# Altium PCB CAMtastic1_2.PcbDoc
Units mm, origin at the board's own origin, x right, y up, seen from the top; angles counter-clockwise.
Board outline 152.47 x 75 mm, 2 copper layers (Top Layer, Bottom Layer); 78 components, 55 nets, 266 pads, 0 vias.
Unrouted connection lines stored in the file: 89.
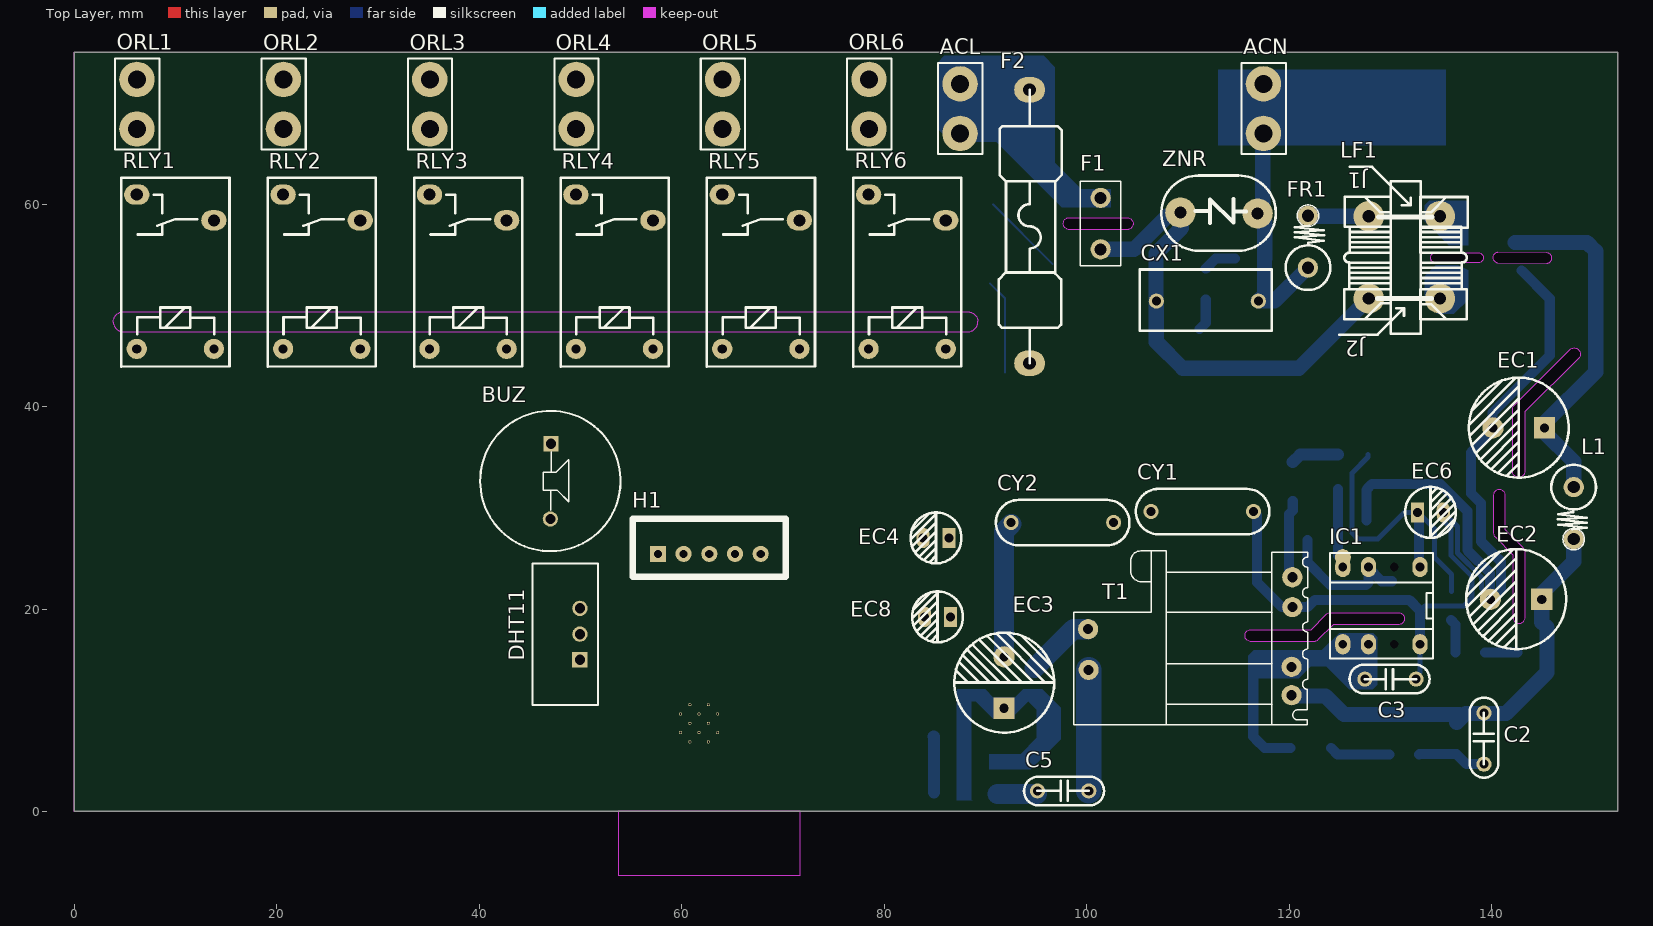
[diagram p0: Top Layer view]
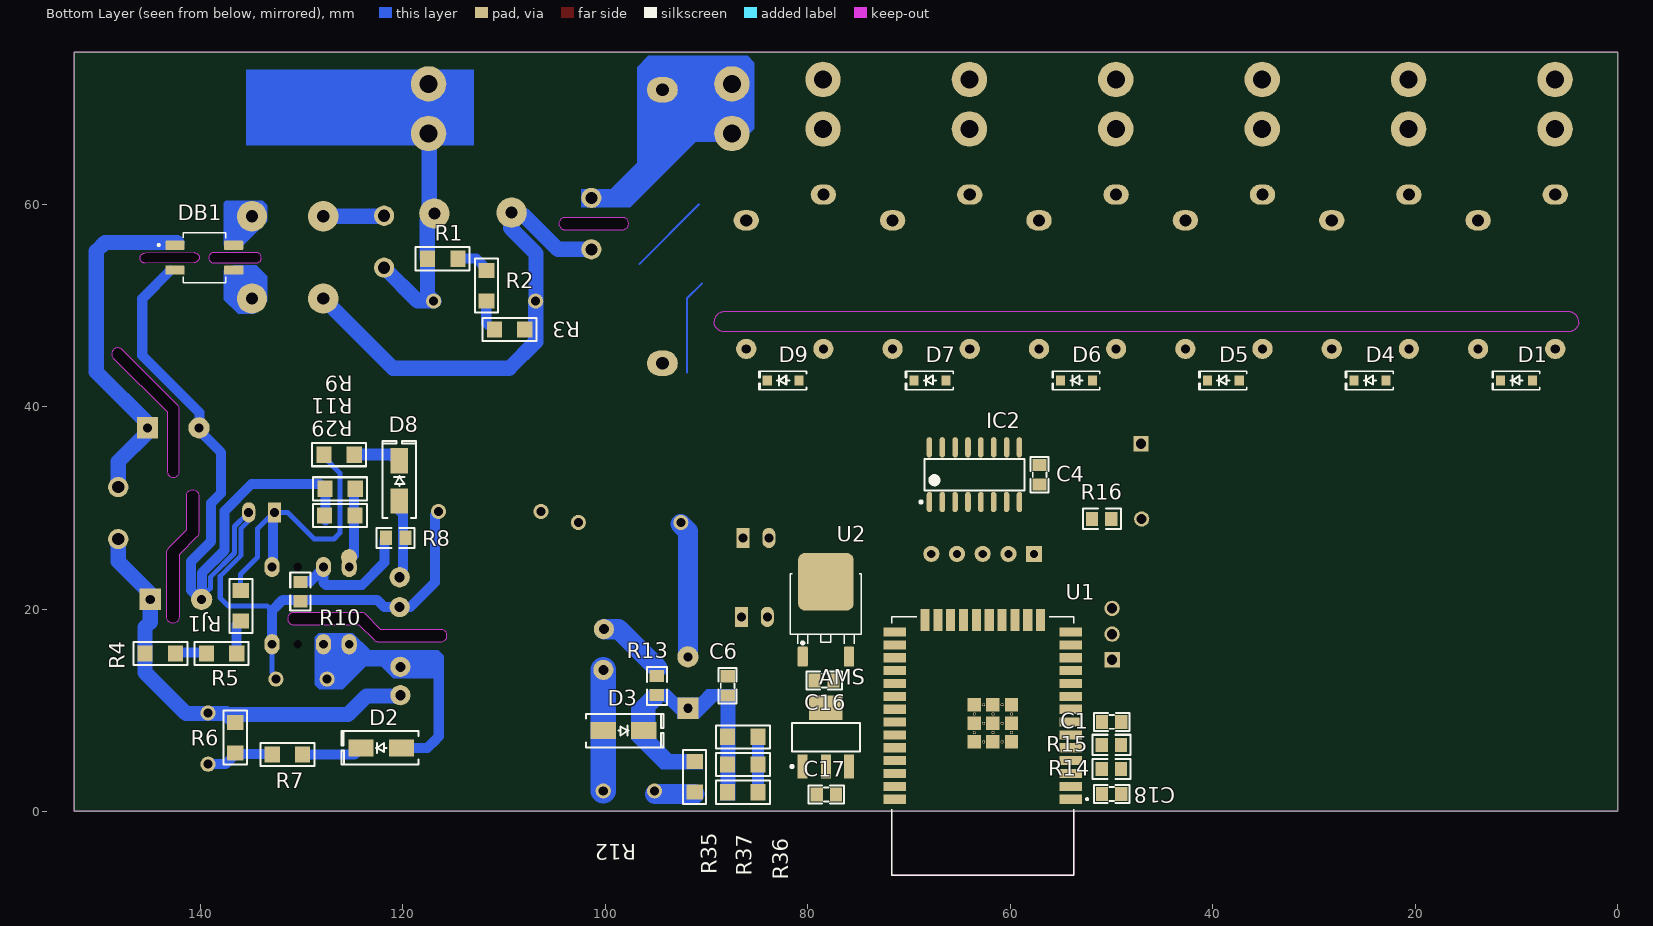
[diagram p1: Bottom Layer view, seen from below]

## Layer stack, top to bottom
Top Solder: solder mask 0.0102, Solder Resist, Dk 3.5
Top Layer: signal copper 0.0356
Dielectric 1: dielectric 0.32, FR-4, Dk 4.8
Bottom Layer: signal copper 0.0356
Bottom Solder: solder mask 0.0102, Solder Resist, Dk 3.5

## Board outline
0,0 152.47,0 152.47,75 0,75
cut-out: 140.62,54.225 145.47,54.175 ccw(c145.475,54.675) 145.975,54.675 ccw(c145.475,54.675) 145.48,55.175 140.63,55.225 ccw(c140.625,54.725)
cut-out: 134.49,54.2 cw(c134.49,54.7) 134.49,55.2 138.69,55.2 cw(c138.69,54.7) 139.19,54.7 cw(c138.69,54.7) 138.69,54.2
cut-out: 116.25,16.775 cw(c116.25,17.375) 116.25,17.975 122.176,17.975 123.675,19.475 cw(c124.1,19.05) 124.1,19.65 130.8,19.65 cw(c130.8,19.05) 131.4,19.05 cw(c130.8,19.05) 130.8,18.45 124.349,18.45 122.85,16.95 cw(c122.425,17.375) 122.425,16.775
cut-out: 140.35,27.139 142.125,25.365 142.125,19.175 ccw(c142.725,19.175) 143.325,19.175 143.325,25.613 ccw(c142.725,25.613) 143.15,26.038 141.375,27.812 141.375,31.2 ccw(c140.775,31.2) 140.175,31.2 140.175,27.563 ccw(c140.775,27.563)
cut-out: 142.089,33.609 142.089,39.715 cw(c142.69,39.715) 142.265,40.139 147.75,45.625 cw(c148.175,45.2) 148.775,45.2 cw(c148.175,45.2) 148.6,44.775 143.29,39.466 143.29,33.609 cw(c142.69,33.609)
cut-out: 98.306,57.476 cw(c98.306,58.076) 98.306,58.677 104.001,58.677 cw(c104.001,58.076) 104.601,58.076 cw(c104.001,58.076) 104.001,57.476

## Design rules (kind name [scope] priority, off if disabled: settings)
Clearance AC_DC [InNetClass('HighVol') vs InNetClass('DCVol')] p1: gap=6 ignorepadtopadclearanceinfootprint=FALSE
Clearance "Low Power/Signal" [All] p2: gap=0.254 ignorepadtopadclearanceinfootprint=FALSE
Clearance "220VAC / 310VDC" [InNetClass('HighVol') vs InNetClass('HighVol')] p3: gap=2.5 ignorepadtopadclearanceinfootprint=FALSE
PolygonConnect CAM_PolygonConnect_$Net1 [InNet('$Net1')] p1: connectstyle=Direct reliefconductorwidth=0.254 reliefentries=4 polygonreliefangle="90 Angle" airgapwidth=0.254
PolygonConnect CAM_PolygonConnect_$Net12 [InNet('$Net12')] p2: connectstyle=Direct reliefconductorwidth=0.254 reliefentries=4 polygonreliefangle="90 Angle" airgapwidth=0.254
PolygonConnect CAM_PolygonConnect_$Net5 [InNet('$Net5')] p3: connectstyle=Direct reliefconductorwidth=0.254 reliefentries=4 polygonreliefangle="90 Angle" airgapwidth=0.254
PolygonConnect CAM_PolygonConnect_$Net15 [InNet('$Net15')] p4: connectstyle=Direct reliefconductorwidth=0.254 reliefentries=4 polygonreliefangle="90 Angle" airgapwidth=0.254
PolygonConnect CAM_PolygonConnect_$Net11 [InNet('$Net11')] p5: connectstyle=Direct reliefconductorwidth=0.254 reliefentries=4 polygonreliefangle="90 Angle" airgapwidth=0.254
PolygonConnect CAM_PolygonConnect_$Net33 [InNet('$Net33')] p6: connectstyle=Direct reliefconductorwidth=0.254 reliefentries=4 polygonreliefangle="90 Angle" airgapwidth=0.254
PolygonConnect CAM_PolygonConnect_$Net27 [InNet('$Net27')] p7: connectstyle=Direct reliefconductorwidth=0.254 reliefentries=4 polygonreliefangle="90 Angle" airgapwidth=0.254
PolygonConnect CAM_PolygonConnect_$Net13 [InNet('$Net13')] p8: connectstyle=Direct reliefconductorwidth=0.254 reliefentries=4 polygonreliefangle="90 Angle" airgapwidth=0.254
PolygonConnect CAM_PolygonConnect_$Net17 [InNet('$Net17')] p9: connectstyle=Direct reliefconductorwidth=0.254 reliefentries=4 polygonreliefangle="90 Angle" airgapwidth=0.254
PolygonConnect CAM_PolygonConnect_$Net23 [InNet('$Net23')] p10: connectstyle=Direct reliefconductorwidth=0.254 reliefentries=4 polygonreliefangle="90 Angle" airgapwidth=0.254
PolygonConnect CAM_PolygonConnect_$Net38 [InNet('$Net38')] p11: connectstyle=Direct reliefconductorwidth=0.254 reliefentries=4 polygonreliefangle="90 Angle" airgapwidth=0.254
PolygonConnect CAM_PolygonConnect_$Net8 [InNet('$Net8')] p12: connectstyle=Direct reliefconductorwidth=0.254 reliefentries=4 polygonreliefangle="90 Angle" airgapwidth=0.254
PolygonConnect CAM_PolygonConnect_$Net3 [InNet('$Net3')] p13: connectstyle=Direct reliefconductorwidth=0.254 reliefentries=4 polygonreliefangle="90 Angle" airgapwidth=0.254
PolygonConnect CAM_PolygonConnect_$Net2 [InNet('$Net2')] p14: connectstyle=Direct reliefconductorwidth=0.254 reliefentries=4 polygonreliefangle="90 Angle" airgapwidth=0.254
PolygonConnect [All] p15: connectstyle=Relief reliefconductorwidth=0.254 reliefentries=4 polygonreliefangle="90 Angle" airgapwidth=0.254
RoutingVias [All] p1: holewidth=0.711 width=1.27 viastyle="Through Hole" minholewidth=0.711 minwidth=1.27 maxholewidth=0.711 maxwidth=1.27
SolderMaskExpansion [All] p1: expansion=0.102 istentingtop=FALSE
Width "+12V, GND" [All] p1: maxlimit=5 minlimit=0.5 preferedwidth=2.5
Width "AC, 310VDC" [InNetClass('HighVol')] p2: maxlimit=2.5 minlimit=0.6 preferedwidth=1.5
Width "Signal - VDD, FB, CS" [InNetClass('All Nets')] p3: maxlimit=1 minlimit=0.23 preferedwidth=0.3
Width [All] p4: maxlimit=0.254 minlimit=0.254 preferedwidth=0.254
30 further rules are at their usual default settings.

## Classes and differential pairs
net class DCVol: +3V3 +5 +12 GND
net class HighVol: COM NetACN_1 NetC3_1 NetCX1_1 NetDB1_3 NetDB1_4 NetFR1_2

## Components (designator, comment, footprint, x,y, rotation, side; value= is the part's Value field where it differs from the comment)
ACL "1217861-1" CON1_P192_70D137_TH_ST 87.503,71.882 r0 top
ACN "1217861-1" CON1_P192_70D137_TH_ST 117.475,71.882 r0 top
AMS "AMS1117-3.3V" SOT223 78.225,7.35 r180 bottom value="AMS1117-3.3V SOT223"
BUZ "Coi Chip Speaker" "Coi 14mm" 60.775,37.725 r270 top
C1 "10pF" "tu 0805" 49.993,8.854 r180 bottom
C2 "22/1KV" "TU GOM CAO AP" 142.372,7.306 r270 top
C3 "22/1KV" "TU GOM CAO AP" 129.922,16.193 r0 top
C4 "10pF" "tu 0805" 57.1,33.275 r270 bottom
C5 "22/1KV" "TU GOM CAO AP" 97.782,-1.084 r180 top
C6 "10pF" "tu 0805" 87.928,12.413 r90 bottom
C16 "10pF" "tu 0805" 78.4,12.925 r0 bottom
C17 "10pF" "tu 0805" 78.175,1.675 r0 bottom
C18 "10pF" "tu 0805" 49.993,1.729 r0 bottom
CX1 "0.1" "Tu vuong 10mm" 106.892,46.609 r0 top
CY1 "222M" "TU GOM CAO AP 222M" 111.499,37.014 r0 top
CY2 "222M" "TU GOM CAO AP 222M" 97.675,35.925 r0 top
D1 "T4" "DIODE SOD-123" 9.987,42.575 r0 bottom
D2 "M7" "DIODE SMA" 122.153,6.287 r0 bottom
D3 "SSS510" "DIODE SMA" 98.213,7.996 r180 bottom
D4 "T4" "DIODE SOD-123" 24.477,42.575 r0 bottom
D5 "T4" "DIODE SOD-123" 38.967,42.575 r0 bottom
D6 "T4" "DIODE SOD-123" 53.457,42.575 r0 bottom
D7 "T4" "DIODE SOD-123" 67.947,42.575 r0 bottom
D8 "M7" "DIODE SMA" 120.363,32.664 r90 bottom
D9 "T4" "DIODE SOD-123" 82.437,42.575 r0 bottom
DB1 "MLB10S" MBLS-1 139.827,54.483 r180 bottom
DHT11 "1x3 2.54" DHT11 49.95,17.525 r90 top
EC1 "680uF/25V" "tu hoa 10mm" 142.69,37.9 r180 top
EC2 "680uF/25V" "tu hoa 10mm" 142.43,20.955 r180 top
EC3 "10UF/400V" "tu hoa 10mm" 91.85,12.74 r90 top
EC4 "100uF/16V" "tu hoa 5mm" 85.125,27.025 r180 top
EC6 "47uF/50V" "tu hoa 5mm" 133.974,29.55 r0 top
EC8 "100uF/16V" "tu hoa 5mm" 85.275,19.225 r180 top
F1 "3.15A 250VAC" "Cau chi 2A 250V T2A250V" 99.106,62.519 r270 top
F2 "16A/250VAC" "Cau Chi 250V" 104.07,58.825 r270 top
FR1 "100uH 3A" "CUON CAM - duplicate" 113.101,55.681 r0 top
H1 "Header 5P 2.54 DT" XH2.54M-5 57.65,25.45 r0 top
IC1 "KP212DP" DIP8 129.125,20.335 r180 top
IC2 "ULN2003" "SOP 16" 63.55,33.275 r90 bottom
L1 "100uH 3A" "CUON CAM - duplicate" 156.894,30.088 r180 top
LF1 "47uH SMD" "Cuon Cam AC-AC" 131.432,54.735 r180 top
ORL1 "1217861-1" CON1_P192_70D137_TH_ST 6.191,72.324 r0 top
ORL2 "1217861-1" CON1_P192_70D137_TH_ST 20.654,72.324 r0 top
ORL3 "1217861-1" CON1_P192_70D137_TH_ST 35.118,72.324 r0 top
ORL4 "1217861-1" CON1_P192_70D137_TH_ST 49.581,72.324 r0 top
ORL5 "1217861-1" CON1_P192_70D137_TH_ST 64.045,72.324 r0 top
ORL6 "1217861-1" CON1_P192_70D137_TH_ST 78.508,72.324 r0 top
R1 "0.68R" "tro smd 1206" 116.078,54.6 r180 bottom
R2 "0.68R" "tro smd 1206" 111.76,51.943 r270 bottom
R3 "0.68R" "tro smd 1206" 109.474,47.625 r180 bottom
R4 "0.68R" "tro smd 1206" 143.97,15.621 r0 bottom
R5 "0.68R" "tro smd 1206" 137.922,15.621 r0 bottom
R6 "0.68R" "tro smd 1206" 136.573,7.294 r90 bottom
R7 "0.68R" "tro smd 1206" 131.418,5.621 r0 bottom
R8 "0.22R" "tro smd 0805" 120.712,26.99 r0 bottom
R9 "0.68R" "tro smd 1206" 126.312,35.25 r180 bottom
R10 "0.22R" "tro smd 0805" 130.175,21.717 r90 bottom
R11 "0.68R" "tro smd 1206" 126.214,31.877 r180 bottom
R12 "0.68R" "tro smd 1206" 91.186,3.429 r270 bottom
R13 "0.22R" "tro smd 0805" 94.869,12.446 r270 bottom
R14 "0.22R" "tro smd 0805" 50.023,4.246 r180 bottom
R15 "0.22R" "tro smd 0805" 50.023,6.621 r180 bottom
R16 "0.22R" "tro smd 0805" 50.979,28.961 r180 bottom
R29 "0.68R" "tro smd 1206" 126.238,29.243 r180 bottom
R35 "0.68R" "tro smd 1206" 86.432,1.9 r0 bottom
R36 "0.68R" "tro smd 1206" 86.432,4.638 r0 bottom
R37 "0.68R" "tro smd 1206" 86.432,7.375 r0 bottom
RJ1 "0.68R" "tro smd 1206" 136.017,20.32 r270 bottom
RLY1 "Relay JZC-8F-1H" "Relay 4 chan JZC-8F" 15.33,43.97 r90 top
RLY2 "Relay JZC-8F-1H" "Relay 4 chan JZC-8F" 29.79,43.97 r90 top
RLY3 "Relay JZC-8F-1H" "Relay 4 chan JZC-8F" 44.25,43.97 r90 top
RLY4 "Relay JZC-8F-1H" "Relay 4 chan JZC-8F" 58.71,43.97 r90 top
RLY5 "Relay JZC-8F-1H" "Relay 4 chan JZC-8F" 73.17,43.97 r90 top
RLY6 "Relay JZC-8F-1H" "Relay 4 chan JZC-8F" 87.63,43.97 r90 top
T1 "Bien ap" "BIEN AP EE1610-12V1.1A" 113.028,16.689 r180 top
U1 "NodeMCU LuaNode32" ESP32-WROOM-32D 62.72,6.475 r0 bottom
U2 "78M05 SMD TO252" TO252 78.225,19 r180 bottom
ZNR "MOV-07D471KTR" "Tu MOV - duplicate" 118.716,62.829 r180 top value=126pF

## Footprints (in the part's own frame and the unit in brackets; to place one, negate y for a bottom-side part, rotate by r counter-clockwise, add the part's x,y. Pads: shape width x height; smd on the part's side, far side on the other; paste and mask are expansions set on the pad)
"BIEN AP EE1610-12V1.1A" [mm]
  round 2 hole 1: 1(-7.225,5.2) 2(-7.225,2.4) 3(-7.3,-3.5) 4(-7.3,-6.45) 5(12.825,2.7) 6(12.875,-1.325)
  silkscreen extent -8.81,-9.05 14.3,8.11
"Cau chi 2A 250V T2A250V" [mm]
  round 2 hole 1.2: 1(1.905,2.286) 2(6.985,2.286)
  silkscreen extent 0.27,0.29 8.62,4.29, body extent 0.27,0.32 8.62,4.32, height 8.1
"Cau Chi 250V" [mm] "De Fuse"
  oval 2.54x3.048 hole 1.27: 1(-12.475,-9.7) 2(14.55,-9.7)
  silkscreen extent -12.47,-12.73 14.55,-6.51, body extent -8.64,-12.2 11.06,-7.1, height 9.41
"Coi 14mm" [mm]
  rect 1.5x1.5 hole 1: 1(1.4,-13.675)
  round 1.5 hole 1: 2(8.825,-13.75)
  silkscreen extent -1.86,-20.68 12.01,-6.81
CON1_P192_70D137_TH_ST [mm] "SOLDER TABS"
  round 3.5 hole 1.778: 1(0,-4.9) 1(0,0)
  silkscreen extent -2.16,-6.95 2.21,2.05, body extent -1.62,-6.31 1.47,1.61, height 10.48
"CUON CAM - duplicate" [mm] "Dang cam giong tro"
  round 2 hole 1.2: 1(8.765,-1.961) 2(8.763,3.175)
  silkscreen extent 6.57,-4.16 10.98,4.24, body extent 6.87,-3.51 10.67,1.23, height 13.57
"Cuon Cam AC-AC" [mm] "Cuon Cam 4.5x5"
  round 3 hole 1.2: 1(3.556,4.064) 2(-3.48,4.064) 3(3.556,-4.064) 4(-3.48,-4.064)
  silkscreen extent -6.22,-8.96 6.48,7.62, body extent -5.39,-7.75 5.61,7.75, height 16.77
DHT11 [mm] "DHT11"
  rect 1.52x1.52 hole 1.02: 1(-2.54,0)
  round 1.52 hole 1.02: 2(0,0) 3(2.54,0)
  silkscreen extent -6.98,-1.78 6.98,4.7, body extent -7.01,-1.8 6.98,4.7, height 29.5
"DIODE SMA" [mm] "SMA"
  rect 2.5x1.7 smd: 1(-2,0) 2(2,0)
  silkscreen extent -3.68,-1.65 3.94,1.65, body extent -2.6,-1.37 2.6,1.37, height 2.4
"DIODE SOD-123" [mm] "SOD-123"
  rect 0.9x0.95 smd: 1(-1.575,0) 2(1.575,0)
  silkscreen extent -2.3,-0.92 2.41,0.92, body extent -1.86,-0.78 1.86,0.77, height 1.35
DIP8 [mm] "W.300/L.400"
  oval 1.5x2 hole 0.864: 1(-3.81,-3.81) 3(1.27,-3.81) 4(3.81,-3.81) 5(3.81,3.81) 6(1.27,3.81) 8(-3.81,3.81)
  round 0 hole 0.864: 2(-1.27,-3.81) 7(-1.27,3.81)
  silkscreen extent -5.08,-5.21 5.08,5.21, body extent -5.4,-3.88 5.4,3.88, height 4.5
ESP32-WROOM-32D [mm]
  rect 2.2x0.9 smd: 1(-8.7,5.26) 2(-8.7,3.99) 3(-8.7,2.72) 4(-8.7,1.45) 5(-8.7,0.18) 6(-8.7,-1.09) 7(-8.7,-2.36) 8(-8.7,-3.63) 9(-8.7,-4.9) 10(-8.7,-6.17) 11(-8.7,-7.44) 12(-8.7,-8.71) 13(-8.7,-9.98) 14(-8.7,-11.25) 25(8.7,-11.25) 26(8.7,-9.98) 27(8.7,-8.71) 28(8.7,-7.44) 29(8.7,-6.17) 30(8.7,-4.9) 31(8.7,-3.63) 32(8.7,-2.36) 33(8.7,-1.09) 34(8.7,0.18) 35(8.7,1.45) 36(8.7,2.72) 37(8.7,3.99) 38(8.7,5.26)
  rect 0.9x2.2 smd: 15(-5.715,-12.45) 16(-4.445,-12.45) 17(-3.175,-12.45) 18(-1.905,-12.45) 19(-0.635,-12.45) 20(0.635,-12.45) 21(1.905,-12.45) 22(3.175,-12.45) 23(4.445,-12.45) 24(5.715,-12.45)
  rect 1.33x1.33 smd: 39(-2.835,-4.075) 39(-2.835,-2.24) 39(-2.835,-0.405) 39(-1,-4.075) 39(-1,-2.24) 39(-1,-0.405) 39(0.835,-4.075) 39(0.835,-2.24) 39(0.835,-0.405)
  round 0.3 hole 0.2: 39(-2.835,-3.157) 39(-2.835,-1.322) 39(-1.917,-4.075) 39(-1.917,-2.24) 39(-1.917,-0.405) 39(-1,-3.157) 39(-1,-1.322) 39(-0.082,-4.075) 39(-0.082,-2.24) 39(-0.082,-0.405) 39(0.835,-3.157) 39(0.835,-1.322)
  Keep-Out Layer region: 9,6.45 -9,6.45 -9,12.75 9,12.75
  Keep-Out Layer region: 9,6.45 -9,6.45 -9,12.75 9,12.75
  silkscreen extent -10.4,-12.75 9,12.75, body extent -9,-12.62 9,12.88, height 3.2
MBLS-1 [mm]
  rrect23% 1.91x0.91 smd: 1(-2.7,1.45) 2(-2.7,-1) 3(3.1,-1) 4(3.1,1.45)
  silkscreen extent -4.4,-2.26 2.3,2.7, body extent -3.15,-2.26 3.55,2.7, height 2.7
"Relay 4 chan JZC-8F" [mm]
  round 2 hole 0.9: 1(1.73,1.54) 2(1.73,9.16)
  oval 2x2.5 hole 1.2: 3(16.97,9.16) 4(14.43,1.54)
  silkscreen extent -0.05,0 18.65,10.68, body extent 0.25,0.25 18.45,10.45, height 15.5
"SOP 16" [mm] "SOIC, 16-Leads, Body 9.90x3.91mm, Pitch 1.27mm, IPC Medium Density"
  oval 2x0.55 smd: 1(-2.7,4.445) 2(-2.7,3.175) 3(-2.7,1.905) 4(-2.7,0.635) 5(-2.7,-0.635) 6(-2.7,-1.905) 7(-2.7,-3.175) 8(-2.7,-4.445) 9(2.7,-4.445) 10(2.7,-3.175) 11(2.7,-1.905) 12(2.7,-0.635) 13(2.7,0.635) 14(2.7,1.905) 15(2.7,3.175) 16(2.7,4.445)
  silkscreen extent -2.82,-4.95 1.55,5.4, body extent -3,-4.95 3,4.95, height 1.4
SOT223 [mm]
  rect 1x2.4 smd: 1(-2.3,-2.9) 2(0,-2.9) 3(2.3,-2.9)
  rect 3.3x2.4 smd: 4(0,2.9)
  silkscreen extent -3.48,-3.02 3.35,1.4, body extent -3.25,-3.56 3.25,3.4, height 1.68
TO252 [mm] "TO252"
  round 0.5 on Mech15: 0(0,0)
  rrect25% 1x2 smd: 1(-2.285,-3.7) 3(2.285,-3.7)
  rrect25% 5.5x5.7 smd: 2(0,3.7)
  silkscreen extent -3.5,-2.47 3.5,4.5, body extent -3.3,-3.95 3.3,5.76, height 2.31
"tro smd 0805" [mm]
  rect 1.2x1.4 smd: 1(-0.946,-0.061) 2(0.954,-0.061)
  silkscreen extent -1.85,-1.03 1.91,0.96, body extent -1.56,-0.76 1.44,0.64, height 0.53
"tro smd 1206" [mm]
  rect 1.5x1.6 smd: 1(-1.5,0) 2(1.5,0)
  silkscreen extent -2.67,-1.14 2.67,1.14, body extent -1.6,-0.8 1.6,0.8, height 0.6
"tu 0805" [mm] "Compoment SMD 80x50mil"
  rect 1.2x1.4 smd: 1(-0.946,-0.003) 2(0.954,-0.003)
  silkscreen extent -1.75,-0.89 1.75,0.89, body extent -1.01,-0.64 1.01,0.63, height 0.61
"TU GOM CAO AP" [mm] "TU GOM CAO AP"
  round 1.5 hole 0.9: 1(-2.431,-3.119) 2(2.631,-3.119)
  silkscreen extent -3.95,-4.52 3.96,-1.7, body extent -2.89,-3.97 2.95,-2.28, height 6.12
"TU GOM CAO AP 222M" [mm] "TU GOM CAO AP"
  round 1.5 hole 0.9: 1(-5.125,-7.375) 2(5,-7.375)
  silkscreen extent -6.63,-9.62 6.56,-5.15
"tu hoa 5mm" [mm]
  rect 1.3x2 hole 0.9: 1(-1.27,0)
  oval 1.3x2 hole 0.9: 2(1.27,0)
  silkscreen extent -2.51,-2.51 2.51,2.51, body extent -3.12,-3.18 3.23,3.18, height 11.33
"tu hoa 10mm" [mm]
  rect 2.1x2.1 hole 0.9: 1(-2.54,0)
  round 2.1 hole 0.9: 2(2.54,0)
  silkscreen extent -4.95,-4.96 4.93,4.92, body extent -5,-5 4.97,5, height 20.01
"Tu MOV - duplicate" [mm]
  round 3 hole 1.2 paste-2539.97 mask+0: 1(1.821,3.753) 2(9.445,3.662)
  silkscreen extent 0.02,0 11.33,7.44, body extent 0,2.75 11.29,4.6, height 16.5
"Tu vuong 10mm" [mm] "Tu gom mini"
  round 1.5 hole 0.9: 1(0,3.81) 2(10.075,3.81)
  silkscreen extent -1.65,0.87 11.41,6.93
XH2.54M-5 [mm]
  rect 1.6x1.6 hole 0.8: 1(0,0)
  round 1.6 hole 0.8: 2(2.54,0) 3(5.08,0) 4(7.62,0) 5(10.16,0)
  silkscreen extent -2.48,-2.26 12.64,3.46, body extent -2.48,-2.26 12.64,3.48, height 6.91

## Part data
ACL ACN ORL1 ORL2 ORL3 ORL4 ORL5 ORL6: library part CON-PLG-SPADE_1X1-256-ST-TH, "1 Pins, 1 Row 256mil Pitch, Straight, Male", Alternate Part Number-1=NA, Case/Package=TH-CON, Manufacturer="TE Connectivity", Mating Part Number=2-520183-2, Manufacturer Part Number=1217861-1, Supplier Part Number-1=1217861-1, Supplier-1=ARROW
AMS: library part "AMS1117 SMD", "Dán", Chung_Loai=Dán, Don_Vi=Con, Ma_Hang=MH000596
BUZ: library part "Coi 14mm", "Cắm"
C1 C4 C6 C16 C17 C18: library part "Tu 0805 10pF 50V 10%", "Dán", Chung_Loai=Dán, Don_Vi=Con, Ma_Hang=MH004554, So_Chan=2, Ten_Linh_Kien="Tụ 0805 10P 10% 50V"
C2 C3 C5: library part "Tu gom CAO AP", "Cắm", Chung_Loai=Cắm, Don_Vi=Con, Ma_Hang=MH004767, So_Chan=2, Ten_Linh_Kien="Tụ gốm 15P 50V"
CX1: library part "Tu MKP X2 0.1uF 275VAC 10MM", "Cắm", Chung_Loai=Cắm, Don_Vi=Con, Ma_Hang=MH007473, So_Chan=2, Ten_Linh_Kien="Tụ tantalum 224-0.22uF 50V DIP5.08 sứ vàng"
CY1 CY2: library part "Tu gom CAO AP 222M", "Cắm", Chung_Loai=Cắm, Don_Vi=Con, Ma_Hang=MH004767, So_Chan=2, Ten_Linh_Kien="Tụ gốm 15P 50V"
D1 D4 D5 D6 D7 D9: library part "Diode S4", "Dán", Chung_Loai=Dán, Don_Vi=Con, Ma_Hang=MH005519, Ten_Linh_Kien="Diode S4 SOD123 ( 1N5819 SOD123)"
D2 D3 D8: library part "Diode M7 1N4007 SMD 1A 1000V", "Dán", Chung_Loai=Dán, Don_Vi=Con, Ma_Hang=MH000944, Ten_Linh_Kien="Diode M7 1N4007 SMD 1A 1000V"
DB1: library part "diode cau MLB10S", "DÁN"
DHT11: library part "DHT11 Module", "Cắm", Chung_Loai=Cắm, Don_Vi=Con, Ma_Hang=MH001265, Ten_Linh_Kien="Jump Đơn Cái 2.54MM 1x40P Cong"
EC1 EC2: library part "Tu Hoa 6.8uF 400V 10x17", "Cắm", Chung_Loai=Cắm, Don_Vi=Con, Ma_Hang=MH003745, So_Chan=2, Ten_Linh_Kien="Tụ Hóa 6.8uF 400V 10x17MM"
EC3: library part "Tu Hoa 1000uF 10V 10x12", "Cắm", Chung_Loai=Cắm, Don_Vi=Con, Ma_Hang=MH006614, So_Chan=2, Ten_Linh_Kien="Tụ Hóa 1000uF 10V 10x12MM"
EC4 EC8: library part "Tu Hoa 330uF 10V 6x11", "Cắm", Chung_Loai=Cắm, Don_Vi=Con, Ma_Hang=MH008830, So_Chan=2, Ten_Linh_Kien="Tụ Hóa 330uF 10V 6x11MM"
EC6: library part "Tu Hoa 47uF 16V 5x10", "Cắm", Chung_Loai=Cắm, Don_Vi=Con, Ma_Hang=MH006859, So_Chan=2, Ten_Linh_Kien="Tụ Hóa 47uF 16V"
F1: library part "Cau chi 2A 250V T2A250V_1", "Cắm", Ma_Hang=MH010033, Ten="Cầu Chì Tự Phục Hồi 2A 24V SMD1812"
F2: library part "Cau chi 16A 250V", "Cắm", Ma_Hang=MH010033, Ten="Cầu Chì Tự Phục Hồi 2A 24V SMD1812"
FR1 L1: library part "CUON CAM VACH DUNG", "Cắm", Chung_Loai=Dán, Don_Vi=Con, Ma_Hang=MH002209, Ten_Linh_Kien="Cuộn Cảm 100uH 3A 8x10MM"
H1 T1: "Cắm"
  H1: Chung_Loai=Cắm, Don_Vi=Con, Ma_Hang=MH001298, Ten_Linh_Kien="Header 5P XH2.54-5P Đực Thẳng"
IC1: library part KP212, "Cắm", Chung_Loai=Cắm, Don_Vi=Con, Ma_Hang=MH002775, Ten_Linh_Kien="AT24C01 DIP8 EEPROM 1KBIT"
IC2: library part "ULN2003A SMD", "Dán", Chung_Loai=Dán, Don_Vi=Con, Ma_Hang=MH002408, Ten_Linh_Kien="ULN2003 SOP16"
LF1: library part "CUON CAM AC_AC", "Cắm", Chung_Loai=Dán, Don_Vi=Con, Ma_Hang=MH004211, Ten_Linh_Kien="Cuộn Cảm 47uH 7x7x4MM CD74R"
R1 R2 R3 R4 R5 R6 R7 R9 R11 R12 R29 R35 R36 R37 RJ1: library part "Tro 1206", "Dán", Chung_Loai=Dán, Don_Vi=Con, Ma_Hang=MH008104, So_Chan=2, Ten_Linh_Kien="Trở 1206 1% 0.68R"
R8 R10 R13 R14 R15 R16: library part "Tro 0805", "Dán", Chung_Loai=Dán, Don_Vi=Con, Ma_Hang=MH005466, So_Chan=2, Ten_Linh_Kien="Trở 0805 1% 0.22R"
RLY1 RLY2 RLY3 RLY4 RLY5 RLY6: library part "Relay 4 chan JZC-8F-1H", "Cắm", Ma_Hang=MH003879, Ten="Relay 5V5A HF46F-G 5-HS1"
U1: library part "ESP32 WROOM 32", "Dán"
U2: "Dán", Chung_Loai=Dán, Don_Vi=Con, Ma_Hang=MH001917, Ten_Linh_Kien="78M05 TO252"
ZNR: library part "Varistor 10D471K 470V", "Cam", Capacitance=126pF, Clamping Current=10A, Clamping Voltage=775V, Manufacturer="Bourns Inc.", Package=0, Temperature="-40°C to +105°C", Temperature Range High=+105°C, Temperature Range Low=-40°C, Varistor Voltage=423V, Voltage Rating Ac=300V, Voltage Rating Dc=385V, Voltage Tolerance=10%, Automotive=No, Category=Res, ComponentLink2Description=Datasheet, ComponentLink2URL=https://www.bourns.com/docs/product-datasheets/mov07d.pdf?sfvrsn=86ba81fd_26, Device Class L1="Circuit Protection", Device Class L2=Varistors, Device Class L3=unset, Digikey Description="VARISTOR 470V 1.2KA DISC 7MM", Height=11mm, Lead Free=Yes, Manufacturer Part Number=MOV-07D471KTR, Mouser Description="Varistors 105pF 470volts 10%", Octopart=https://octopart.com/mov-07d471ktr-bourns-19184728, RoHS=TRUE

## Free pads (board coordinates)
  round 1.6 smd far side: 1(125.315,25.115)
  round 1.6 smd: 1(125.32,25.115)
  rect 2x2 smd: 1(134.96,50.72)
  round 2 smd: 1(134.96,58.72)
  round 2 smd far side: 1(139.888,20.975)

## Nets (pads, with @x,y where several pads share a name; then routed paths per layer and width w, separated by ;. In a path a pad name is that pad's centre, name@x,y a point inside that pad or via, vN(x,y) a via of type N, cw(c..) or ccw(c..) an arc to the next point about the centre after c; other vN are vias at no path point)
+3V3: AMS.2 AMS.4 C17.1 C18.1 R14.2 R15.2 U1.2
+5: AMS.3 C16.1 DHT11.1 EC4.1 EC8.1 U2.3
+12: BUZ.1 C4.1 C6.1 D1.2 D3.2 D4.2 D5.2 D6.2 D7.2 D9.2 EC3.1 IC2.9 R12.1 R13.2 R35.2 R36.2 R37.2 RLY1.1 RLY2.1 RLY3.1 RLY4.1 RLY5.1 RLY6.1
+310V: C2.1 EC2.1 L1.2 R4.2 R6.2 T1.1 | length 42.9
  Bottom Layer w1.5: T1.1@120.353,11.414 123.603,11.414 125.443,9.574 136.793,9.574 ; R6.2 137.453,9.674 141.444,9.674 145.486,13.716 R4.2@145.486,15.704 ; R4.2@145.47,15.72 145.47,18.2 144.97,18.7 144.97,21.55 148.128,24.708 L1.2@148.128,26.969
BUZZ: R16.1 U1.36
COM: ACL.1 F1.1 F2.1
DHT11: DHT11.2 U1.26
EN: C1.1 H1.2 R15.1 U1.3
GND: AMS.1 C1.2 C4.2 C6.2 C16.2 C17.2 C18.2 CY2.1 DHT11.3 EC3.2 EC4.2 EC8.2 H1.1 IC2.8 R13.1 T1.6 U1.1 U2.2 | length 20.3
  Bottom Layer w2: EC3.2 91.85,27.68 CY2.1@92.559,28.389 ; 94.873,14.184 98.703,18.014 T1.6
GND-1: C3.2 CY1.2 DB1.2 EC1.2 EC2.2 EC6.2 IC1.8 pad.1@139.888,20.975 R10.1 R11.1 R29.1 T1.3 | length 119
  Bottom Layer w0.5: C3.2 132.553,13.372 132.935,13.754 IC1.8 ; 132.942,19.836 133.426,20.32 137.287,20.32 138.049,21.082 138.049,23.241 136.017,25.273 136.017,27.94 135.376,28.581 EC6.2@135.376,29.427 ; EC6.2@135.204,29.6 EC6.2@135.376,29.427 ; EC2.2 139.89,21.188 139.853,21.224 139.03,22.048 139.03,23.148 136.652,25.526 136.652,28.152 EC6.2@135.376,29.427
  Bottom Layer w1: CY1.2 116.843,29.294 116.843,22.644 119.298,20.189 T1.3 ; T1.3@120.473,20.184 121.833,20.184 122.561,20.912 131.866,20.912 132.942,19.836 ; R29.1@127.665,28.729 R11.1@127.665,31.739 ; R11.1 128.181,32.344 134.963,32.344 137.613,29.694 137.613,25.814 139.853,23.574 139.853,21.224 pad.1@139.853,21.142 ; IC1.8@132.942,16.525 132.942,19.473 ; pad.1@140.021,20.942 140.953,21.874 140.953,24.684 138.953,26.684 138.953,30.474 137.983,31.444 137.983,35.481 EC1.2@140.102,37.599 ; EC1.2 140.102,37.948 140.102,39.393 145.753,45.044 145.753,46.9 145.753,50.667 DB1.2@142.982,53.438
IN1: IC2.6 U1.33
IN2: IC2.5 U1.31
IN3: IC2.4 U1.30
IN4: IC2.3 U1.29
IN5: IC2.2 U1.28
IN6: IC2.1 U1.27
IO0: H1.5 R14.1 U1.25
NetACN_1: ACN.1 CX1.2 FR1.1 R1.1 ZNR.1 | length 22.6
  Bottom Layer w1.5: ACN.1@117.403,65.929 117.403,59.838 116.768,59.203 117.604,58.367 R1.1@117.604,54.62 ; R1.1 117.578,51.03 CX1.2 118.554,50.419 FR1.1@121.845,53.71
NetBUZ_2: BUZ.2 R16.2
NetC2_2: C2.2 R6.1 R7.2 | length 6.8
  Bottom Layer w1: R7.2@132.843,5.621 132.884,5.662 136.553,5.662 137.541,4.674 C2.2
NetC3_1: C3.1 D2.1 IC1.5 IC1.6 T1.2 | length 14.8
  Bottom Layer w1: D2.1 117.571,6.287 116.723,7.134 116.723,7.164 116.463,7.424 116.463,13.934 116.893,14.364 T1.2@120.353,14.364
NetC5_1: C5.1 D3.1 T1.5 | length 12
  Bottom Layer w2.5: T1.5 100.203,2.044 C5.1
NetC5_2: C5.2 R12.2 | length 3.9
  Bottom Layer w2: R12.2@91.21,1.734 C5.2@95.104,1.734
NetCX1_1: CX1.1 F1.2 LF1.1 R3.2 ZNR.2 | length 48
  Bottom Layer w1.5: F1.2 104.683,55.534 108.029,58.88 108.985,58.88 ZNR.2 ; CX1.1@106.867,50.419 106.867,55.128 109.375,57.636 ZNR.2@109.375,59.063 ; CX1.1 106.892,46.39 109.5,43.783 120.987,43.783 LF1.1
NetCY1_1: CY1.1 CY2.2
NetD2_2: D2.2 R7.1 | length 6
  Bottom Layer w1: D2.2 124.82,5.621 R7.1
NetD8_1: D8.1 R8.1 T1.4 | length 7.4
  Bottom Layer w1: T1.4@119.993,23.424 119.993,29.364 120.363,29.734 D8.1
NetD8_2: D8.2 R9.2 | length 4.7
  Bottom Layer w1.2: D8.2@120.375,34.521 121.104,35.25 R9.2
NetDB1_1: DB1.1 EC1.1 L1.1 | length 34.4
  Bottom Layer w1.5: DB1.1@142.318,56.225 149.425,56.225 150.303,55.346 150.303,43.424 EC1.1@145.102,38.223 ; EC1.1@145.102,37.599 148.128,34.573 L1.1
NetDB1_3: DB1.3 LF1.2 pad.1@134.96,50.72
NetDB1_4: DB1.4 LF1.4 pad.1@134.96,58.72
NetEC6_1: EC6.1 IC1.1 R9.1 RJ1.1 | length 30.8
  Bottom Layer w0.5: R9.1 127.812,35.012 126.238,33.438 126.238,27.51 126.824,26.924 128.778,26.924 131.404,29.55 EC6.1 ; EC6.1@132.704,29.6 132.839,29.464 134.37,27.934 134.37,25.108 136.045,23.433 RJ1.1@136.045,21.752
  Bottom Layer w1: EC6.1@132.839,29.464 132.839,24.241 IC1.1
NetF2_2: F2.2 RLY1.4 RLY2.4 RLY3.4 RLY4.4 RLY5.4 RLY6.4
NetFR1_2: FR1.2 LF1.3 | length 6
  Bottom Layer w1.5: FR1.2@121.867,58.799 LF1.3
NetIC1_3: IC1.3 R8.2 R10.2 | length 13.7
  Bottom Layer w1: R8.2@121.816,26.824 121.816,24.61 124.045,22.381 127.622,22.381 127.861,22.621 IC1.3@127.861,24.024 ; IC1.3@127.798,24.088 IC1.3@127.861,24.024 ; IC1.3 127.861,24.139 IC1.3@127.861,24.024 ; R10.2@130.167,22.737 130.154,22.749 129.136,22.749 IC1.3@127.861,24.024
NetIC1_4: IC1.4 pad.1@125.32,25.115 pad.1@125.315,25.115 R11.2 R29.2 | length 7.2
  Bottom Layer w1: R11.2@124.836,31.834 124.836,25.306 pad.1@125.312,24.83
NetORL1_1: ORL1.1 RLY1.3
NetORL2_1: ORL2.1 RLY2.3
NetORL3_1: ORL3.1 RLY3.3
NetORL4_1: ORL4.1 RLY4.3
NetORL5_1: ORL5.1 RLY5.3
NetORL6_1: ORL6.1 RLY6.3
NetR1_2: R1.2 R2.1 | length 3.3
  Bottom Layer w1: R2.1@111.77,53.625 112.765,54.62 R1.2@114.679,54.62
NetR2_2: R2.2 R3.1 | length 3.2
  Bottom Layer w1: R3.1@111.165,47.658 111.77,48.263 R2.2@111.77,50.575
NetR4_1: R4.1 R5.2 | length 3.2
  Bottom Layer w1: R5.2@139.366,15.704 R4.1@142.561,15.704
NetR5_1: R5.1 RJ1.2 | length 3.4
  Bottom Layer w1: RJ1.2@136.013,18.899 136.441,18.472 R5.1@136.441,15.704
NetR35_1: R35.1 R36.1 R37.1 U2.1 | length 5.5
  Bottom Layer w1.2: R37.1@84.907,7.4 R37.1 R35.1
O1: D1.1 IC2.11 RLY1.2
O2: D4.1 IC2.12 RLY2.2
O3: D5.1 IC2.13 RLY3.2
O4: D6.1 IC2.14 RLY4.2
O5: D7.1 IC2.15 RLY5.2
O6: D9.1 IC2.16 RLY6.2
RX: H1.4 U1.34
TX: H1.3 U1.35
pads on no net: IC1.2 IC1.7 IC2.7 IC2.10 U1.4 U1.5 U1.6 U1.7 U1.8 U1.9 U1.10 U1.11 U1.12 U1.13 U1.14 U1.15 U1.16 U1.17 U1.18 U1.19 U1.20 U1.21 U1.22 U1.23 U1.24 U1.32 U1.37 U1.38 U1.39 U2.0
copper on no net: | length 17.8
  Bottom Layer w0.2: 90.453,52.174 91.953,50.674 91.953,43.374 ; 90.753,59.974 96.653,54.074

## Keep-outs
Keep-Out Layer:
  lines w0.05: 88.278,49.356 88.347,49.354 88.415,49.347 88.483,49.335 88.549,49.318 88.614,49.297 88.678,49.271 88.739,49.241 88.799,49.207 88.856,49.169 88.91,49.127 88.961,49.081 89.008,49.031 89.052,48.979 89.093,48.923 89.129,48.865 89.161,48.805 89.189,48.742 89.212,48.678 89.231,48.612 89.245,48.545 89.255,48.477 89.26,48.409 89.26,48.34 89.255,48.272 89.245,48.204 89.231,48.137 89.212,48.071 89.189,48.007 89.161,47.944 89.129,47.883 89.093,47.825 89.052,47.77 89.008,47.717 88.961,47.668 88.91,47.622 88.856,47.58 88.799,47.542 88.739,47.507 88.678,47.477 88.614,47.452 88.549,47.431 88.483,47.414 88.415,47.402 88.347,47.395 88.279,47.393 ; 88.278,47.393 88.279,47.393 ; 0,0 152.47,0 152.47,75 0,75 0,0
  lines w0.061: 88.278,47.392 4.84,47.392 4.772,47.395 4.703,47.402 4.636,47.414 4.569,47.431 4.504,47.452 4.441,47.477 4.379,47.507 4.32,47.542 4.263,47.58 4.209,47.622 4.158,47.668 4.11,47.717 4.066,47.77 4.026,47.825 3.99,47.883 3.958,47.944 3.93,48.007 3.906,48.071 3.887,48.137 3.873,48.204 3.864,48.272 3.859,48.34 3.859,48.409 3.864,48.477 3.873,48.545 3.887,48.612 3.906,48.678 3.93,48.742 3.958,48.805 3.99,48.865 4.026,48.923 4.066,48.979 4.11,49.031 4.158,49.081 4.209,49.127 4.263,49.169 4.32,49.207 4.379,49.241 4.441,49.271 4.504,49.297 4.569,49.318 4.636,49.335 4.703,49.347 4.772,49.354 4.84,49.356 88.278,49.356

## Other copper
Bottom Layer:
  region net +12: 90.8,9.15 89.069,10.881 87.238,10.881 87.225,10.867 87.225,12.067 89.982,12.067 90.8,11.25 92.9,11.25 92.9,9.15
  region net +12: 90.386,5.679 93.497,5.679 95.091,7.273 95.091,10.03 94.23,10.892 92.9,9.561 92.9,9.15 90.8,9.15 90.8,11.25 92.9,11.25 93.741,12.092 95.63,12.092 97.463,10.258 97.463,7.146 94.497,4.179 90.386,4.179
  region net +12: 87.225,12.067 87.182,12.025 87.182,1.1 88.682,1.1 88.625,1.158 88.625,12.067
  region net NetDB1_3: 137.682,53.483 137.682,50.56 136.293,49.171 134.63,49.171 133.412,50.389 133.412,52.868 134.482,53.938 136.727,53.938
  region net NetDB1_4: 135.772,55.933 133.412,58.293 133.412,59.879 133.858,60.325 137.494,60.325 137.682,60.137 137.682,55.933
  region net NetC3_1: 128.271,12.086 128.711,12.526 128.711,17.212 128.307,17.616 124.958,17.616 123.258,15.916 116.523,15.916 115.983,15.376 115.983,14.044 116.881,13.146 120.943,13.146 120.943,13.167 122.127,14.351 123.698,14.351 125.963,12.086
  region net COM: 102.372,61.477 102.372,59.677 97.549,59.677 91.059,66.167 86.574,66.167 85.304,67.437 85.304,73.977 85.964,74.637 95.754,74.637 96.865,73.525 96.865,64.085 99.474,61.477
  region net NetACN_1: 113,73.27 113,65.835 112.995,65.83 135.495,65.83 135.495,73.265 135.5,73.27

## Silkscreen, mask and mechanical layers (free items; w line width, h text height)
Mechanical 1:
  lines w1: 134.49,54.7 138.69,54.7 ; 140.625,54.725 145.475,54.675
  lines w1.2: 98.306,58.076 104.001,58.076 ; 116.25,17.375 122.425,17.375 124.1,19.05 130.8,19.05 ; 140.775,31.2 140.775,27.563 142.725,25.613 142.725,19.175 ; 142.69,33.609 142.69,39.715 148.175,45.2

## Text inside footprints (layer, text, board x,y; h text height)
LF1: Top Overlay "J1" at 127.749,63.117 h1.52 r180; Top Overlay "J2" at 127.495,46.48 h1.52 r180
U1: Mechanical 13 "ANTENNA" at 56.72,-2.525 h1.78 r180